# Altium PCB Fake.PcbDoc
Units mil, origin at the board's own origin, x right, y up, seen from the top; angles counter-clockwise.
Board outline 6000 x 4000 mil, 2 copper layers (Top Layer, Bottom Layer); 122 components, 82 nets, 618 pads, 0 vias.
Unrouted connection lines stored in the file: 222.
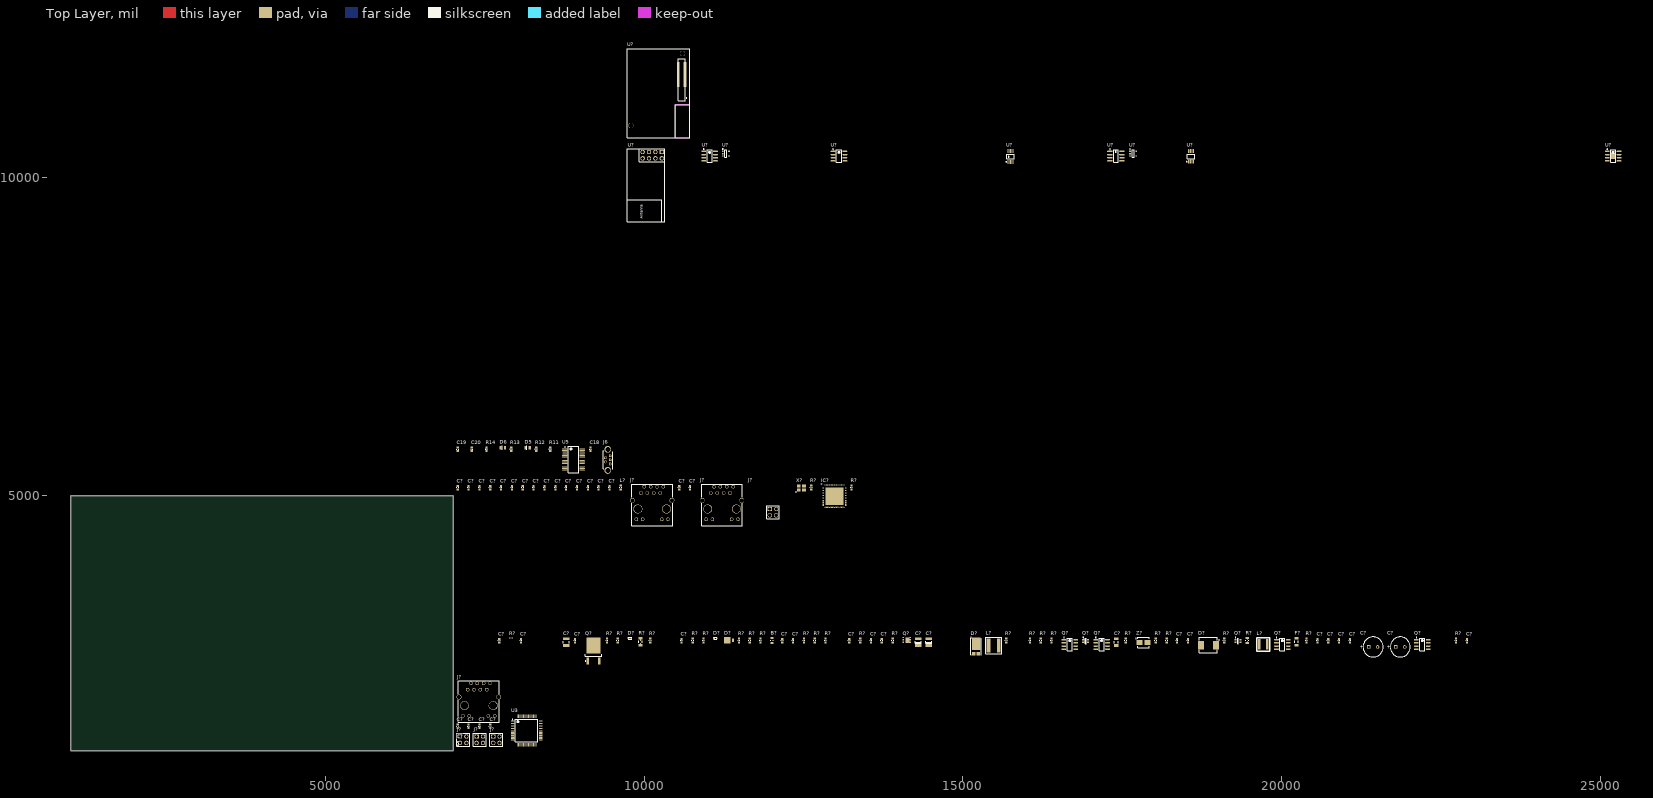
[diagram p0: Top Layer view]
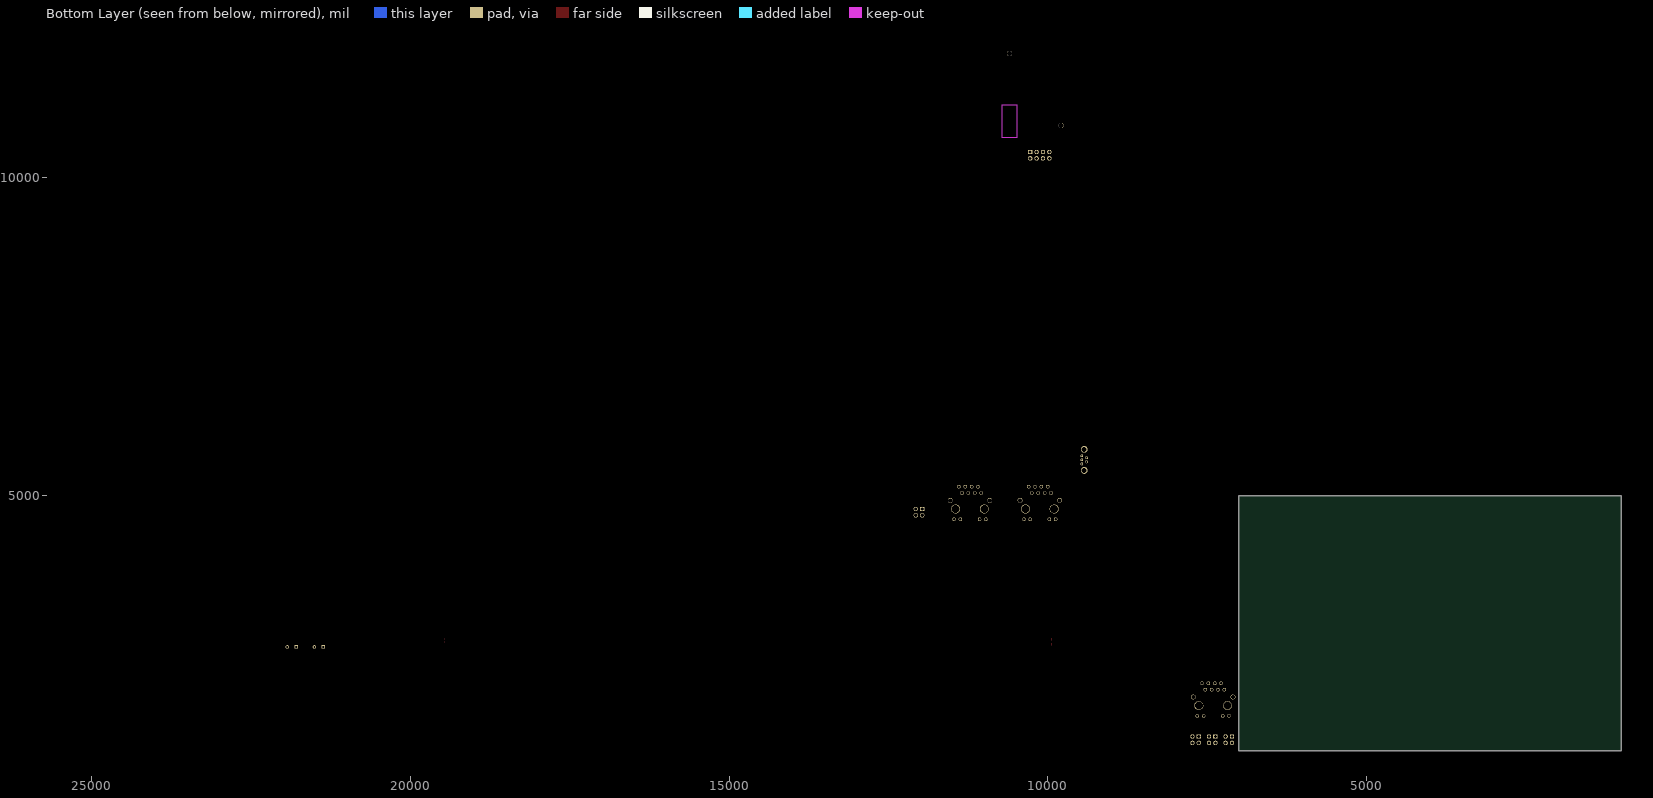
[diagram p1: Bottom Layer view, seen from below]

## Layer stack, top to bottom
Top Solder: solder mask 0.4, Solder Resist, Dk 3.5
Top Layer: signal copper 1.4
Dielectric 1: dielectric 12.6, FR-4, Dk 4.8
Bottom Layer: signal copper 1.4
Bottom Solder: solder mask 0.4, Solder Resist, Dk 3.5

## Board outline
1000,1000 7000,1000 7000,5000 1000,5000

## Design rules (kind name [scope] priority, off if disabled: settings)
Clearance [All] p1: gap=10
DiffPairsRouting [All] p1: maxlimit=10 minlimit=10 mostfreqgap=10 toplayer_minwidth=15 toplayer_maxwidth=15 toplayer_prefwidth=15 bottomlayer_minwidth=15 bottomlayer_maxwidth=15 bottomlayer_prefwidth=15 maxuncoupledlength=500
PolygonConnect [All] p1: connectstyle=Relief reliefconductorwidth=10 reliefentries=4 polygonreliefangle="90 Angle" airgapwidth=10
RoomDefinition Designator_1 [InComponentClass('Designator')] p1: confinementstyle=ConfineIn formatcopy=TRUE lockcomponents=FALSE outline 0,0 2000,0 2000,1000 0,1000
RoomDefinition ETHERNET_USB_HUB [InComponentClass('ETHERNET_USB_HUB')] p2: confinementstyle=ConfineIn formatcopy=TRUE lockcomponents=FALSE outline 7045,1060 7690,1060 7690,1550 7045,1550
RoomDefinition EDISON [InComponentClass('EDISON')] p3: confinementstyle=ConfineIn formatcopy=TRUE lockcomponents=FALSE outline 2675,7660 4675,7660 4675,8660 2675,8660
RoomDefinition USB_CONSOL [InComponentClass('USB_CONSOL')] p4: confinementstyle=ConfineIn formatcopy=TRUE lockcomponents=FALSE outline 7045,5335 9515,5335 9515,5895 7045,5895
RoomDefinition PIC [InComponentClass('PIC')] p5: confinementstyle=ConfineIn formatcopy=TRUE lockcomponents=FALSE outline 7045,5335 9515,5335 9515,5895 7045,5895
RoomDefinition Designator [InComponentClass('Designator')] p6: confinementstyle=ConfineIn formatcopy=TRUE lockcomponents=FALSE outline 7045,5335 9515,5335 9515,5895 7045,5895
RoutingVias [All] p1: holewidth=28 width=50 viastyle="Through Hole" minholewidth=28 minwidth=50 maxholewidth=28 maxwidth=50
SolderMaskExpansion [All] p1: expansion=4
Width [All] p1: maxlimit=10 minlimit=10 preferedwidth=10
29 further rules are at their usual default settings.

## Classes and differential pairs
component class PIC: C? U3
component class ETHERNET_USB_HUB: C? IC? J? L? R? X?
component class EDISON: U?
component class Designator: B? C? D? F? L? Q? R? U? Z?
component class USB_CONSOL: C18 C19 C20 D5 D6 J6 R11 R12 R13 R14 U5
differential pair USB_D: +USB_D_P -USB_D_N

## Components (designator, comment, footprint, x,y, rotation, side; value= is the part's Value field where it differs from the comment)
B? "FB_782853112" R0805 12005,2730 r90 top
C18 "__template_cap" C0603 9155,5730 r90 top
C19 "__template_cap" C0603 7075,5730 r90 top
C20 "__template_cap" C0603 7295,5730 r90 top
C? "__template_cap" C0603 7075,1115 r90 top
C? "__template_cap" C0603 7585,1385 r90 top
C? "__template_cap" C0603 7415,1385 r90 top
C? "__template_cap" C0603 7245,1385 r90 top
C? "__template_cap" C0603 7075,1385 r90 top
C? "__template_cap" C0603 8435,5130 r90 top
C? "__template_cap" C0603 8605,5130 r90 top
C? "__template_cap" C0603 8775,5130 r90 top
C? "__template_cap" C0603 8945,5130 r90 top
C? "__template_cap" C0603 9115,5130 r90 top
C? "__template_cap" C0603 9285,5130 r90 top
C? "__template_cap" C0603 9455,5130 r90 top
C? "__template_cap" C0603 7925,5130 r90 top
C? "__template_cap" C0603 8095,5130 r90 top
C? "__template_cap" C0603 8265,5130 r90 top
C? "__template_cap" C0603 7755,5130 r90 top
C? "__template_cap" C0603 7585,5130 r90 top
C? "__template_cap" C0603 7245,5130 r90 top
C? "__template_cap" C0603 7075,5130 r90 top
C? "__template_cap" C0603 7415,5130 r90 top
C? "__template_cap" c0603 10550,5130 r90 top
C? "__template_cap" c0603 10720,5130 r90 top
C? "__template_cap" C0603 22905,2730 r90 top
C? "__template_cap" C0603 18360,2730 r90 top
C? "__template_cap" C0603 18530,2730 r90 top
C? "680 μF" "WCAP-PTG5 8x8x3.5x0.6" 21860,2630 r0 top
C? "680 μF" "WCAP-PTG5 8x8x3.5x0.6" 21435,2630 r0 top
C? "__template_cap" C0603 21070,2730 r90 top
C? "__template_cap" C0603 20900,2730 r90 top
C? "__template_cap" C0603 20730,2730 r90 top
C? "__template_cap" C0603 20560,2730 r90 top
C? "__template_cap" C0603 13725,2730 r90 top
C? "__template_cap" C0603 13555,2730 r90 top
C? "__template_cap" C0603 12335,2730 r90 top
C? "__template_cap" C0603 12165,2730 r90 top
C? "CAP_TANT_330UF_6.3V" C1210P 14295,2705 r90 top
C? "CAP_TANT_330UF_6.3V" C1210P 14465,2705 r90 top
C? "__template_cap" C0603 13215,2730 r90 top
C? "__template_cap" C0603 10585,2730 r90 top
C? "__template_cap" C0603 8915,2730 r90 top
C? "__template_cap" C1210 8780,2705 r90 top
C? "__template_cap" C0603 8065,2730 r90 top
C? "__template_cap" C0603 7725,2730 r90 top
C? "__template_cap" C1206 17405,2705 r90 top
D5 "LED_LY974" 0805_Diode 8180,5755 r0 top
D6 "LED_LY974" 0805_Diode 7790,5755 r0 top
D? "__template_diode_std" SOD523 11115,2765 r0 top
D? "__template_diode_std" SOD523 9775,2765 r0 top
D? "__template_diode_schottky" DO-220AA 11300,2735 r0 top
D? "__template_diode_schottky" SMC 18850,2660 r0 top
D? "__template_diode_schottky" PowerDI5 15205,2585 r90 top
F? "__template_fuse" R1206 20235,2710 r90 top
IC? "LAN9512 www.hasseb.fi" QFN64-9X9 12985,4995 r0 top
J6 "732-2735-ND" CONN_USBMINIB_VERTICAL_WE 9465,5565 r90 top
J? "CONN_ETHERNET_MAG_PARJC07-111071A" ETHERNET_MAG_ARJC07-111071A 7405,1710 r0 top
J? "CONN HEADER 2x2POS T/H" CONN_2x2_100MIL_MALE 7110,1225 r0 top
J? "CONN HEADER 2x2POS T/H" CONN_2x2_100MIL_MALE 7370,1225 r0 top
J? "CONN HEADER 2x2POS T/H" CONN_2x2_100MIL_MALE 7630,1225 r0 top
J? "CONN HEADER 2x2POS T/H" CONN_2x2_100MIL_MALE 11970,4795 r0 top
J? "CONN_ETHERNET_MAG_PARJC07-111071A" ETHERNET_MAG_ARJC07-111071A 11220,4795 r0 top
J? "CONN_ETHERNET_MAG_PARJC07-111071A" ETHERNET_MAG_ARJC07-111071A 10125,4795 r0 top
L? "" R0603 9630,5130 r90 top
L? "IND_COILCRAFT_XAL5050-562" COILCRAFT_XAL5050-103 19710,2670 r0 top
L? "IND_COILCRAFT_XAL6030-182" IND_COILCRAFT_XAL60 15400,2655 r0 top
Q? "NFET_SI1970DH" SOT363-6N 19315,2725 r0 top
Q? "PFET_IRF7329PBFCT-ND" 8SOIC150 22205,2670 r0 top
Q? "PFET_IRF7329PBFCT-ND" 8SOIC150 17175,2670 r0 top
Q? "85V 50A TO-252" DPAK 9205,2570 r90 top
Q? "NFET_CSD16323Q3" 8-VSON 14060,2775 r0 top
Q? "NFET_SI1970DH" SOT363-6N 16925,2725 r0 top
Q? "PFET_IRF7329PBFCT-ND" 8SOIC150 20010,2670 r0 top
Q? "PFET_IRF7329PBFCT-ND" 8SOIC150 16675,2670 r0 top
R11 "__template_resistor" R0603 8525,5730 r90 top
R12 "__template_resistor" R0603 8305,5730 r90 top
R13 "__template_resistor" R0603 7915,5730 r90 top
R14 "__template_resistor" R0603 7525,5730 r90 top
R? "__template_resistor" R0603 13250,5130 r90 top
R? "__template_resistor" R0603 12620,5130 r90 top
R? "__template_resistor" R0603 18195,2730 r90 top
R? "__template_resistor" R0603 19100,2730 r90 top
R? "__template_resistor" R0603 20390,2730 r90 top
R? "__template_resistor" R0603 16390,2730 r90 top
R? "__template_resistor" R0603 16220,2730 r90 top
R? "__template_resistor" R0603 17555,2730 r90 top
R? "__template_resistor" R0603 16050,2730 r90 top
R? "__template_resistor" R0603 22735,2730 r90 top
R? "__template_resistor" R0603 18025,2730 r90 top
R? "RESISTOR .020 OHM 1/4W 1% 0805" R0805_SHUNT 19460,2730 r90 top net-tie
R? "__template_resistor" R0603 11485,2730 r90 top
R? "__template_resistor" R0603 10930,2730 r90 top
R? "__template_resistor" R0603 12505,2730 r90 top
R? "__template_resistor" R0603 12675,2730 r90 top
R? "__template_resistor" R0603 12845,2730 r90 top
R? "__template_resistor" R0603 11825,2730 r90 top
R? "__template_resistor" R0603 13390,2730 r90 top
R? "__template_resistor" R0603 13900,2730 r90 top
R? "__template_resistor" R0603 15680,2730 r90 top
R? "__template_resistor" R0603 11655,2730 r90 top
R? "__template_resistor" R0603 9585,2730 r90 top
R? "__template_resistor" R0603 10095,2730 r90 top
R? "__template_resistor" R0603 10760,2730 r90 top
R? "__template_resistor" R0603 9415,2730 r90 top
R? "RES_CURRENT_SENSE_0.002_OHM_1W_1%_1206_SMD" R1206_SHUNT 9940,2710 r90 top net-tie
R? "__template_resistor" R0402 7910,2770 r0 top
U3 "MCHP_dsPIC33EP128MC506" 64TQFP10 8155,1320 r0 top
U5 "FT232RL-Tube" SSOP-28_N 8890,5570 r0 top
U? "INTEL_EDISON" INTEL_EDISON 9790,10810 r0 top
U? "BUCK_TPS54540" 8SOIC150E 25200,10330 r0 top
U? "UCC381DP-3" TI-D8_N 17400,10330 r0 top
U? "LTC1871EMS#PBF" LT-MS-10_N 15745,10325 r90 top
U? "BUFFER_SN74AHCT1G125DBVR" 5SOT23 17670,10370 r0 top
U? "PIC12F1571-I/MS" MCHP-MSOP-MS8_N 18580,10325 r90 top
U? "FETDRIVER_LT1910" 8SOIC150 13055,10330 r0 top
U? "ISENSE_ACS711" 8SOIC150 11025,10330 r0 top
U? "TSENSE_TC74" 5SOT23 11280,10370 r0 top
U? "SEEEDSTUDIO_nRF24L01+" SEEEDSTUDIO_nRF24L01 10325,10445 r90 top
X? "XTAL_ XC1817CT-ND" 4_SMD_3.2X2.5MM 12465,5120 r0 top
Z? "__template_diode_zener" DO-214AA 17830,2700 r0 top

## Footprints (in the part's own frame and the unit in brackets; to place one, negate y for a bottom-side part, rotate by r counter-clockwise, add the part's x,y. Pads: shape width x height; smd on the part's side, far side on the other; paste and mask are expansions set on the pad)
4_SMD_3.2X2.5MM [mm]
  rect 1.5x1.2 smd: 1(-1.06,-0.8) 2(1.06,-0.8) 3(1.06,0.8) 4(-1.06,0.8)
  silkscreen extent -2.2,-1.6 -2,-1.4, body extent -1.6,-1.25 1.6,1.25, height 1
5SOT23 [mm] "SOT23, 5-Leads, Body 2.9x2.8mm (max), Pitch 0.95mm, IPC High Density"
  rect 0.75x0.55 smd: 1(-1.225,0.95) 2(-1.225,0) 3(-1.225,-0.95) 4(1.225,-0.95) 5(1.225,0.95)
  silkscreen extent -1.35,-1.45 0.45,1.9, body extent -1.5,-1.5 1.5,1.5, height 1.46
8-VSON [mm] "PowerPAK 1212-8 Single (Vishay footprint)"
  rect 0.63x0.4 smd mask+0.07: 1(0,0) 2(0,-0.65) 3(0,-1.3) 4(0,-1.95) 5(2.875,-1.95) 5(2.875,-1.3) 5(2.875,-0.65) 5(2.875,0)
  rect 1.725x2.204 smd: 5(1.75,-0.975)
  body extent -0.33,-2.23 3.17,0.27, height 1.05
8SOIC150 [mm] "SOIC, 8-Leads, Body 5.0x4.0mm (max), Pitch 1.27mm, IPC High Density"
  oval 1.9x0.6 smd: 1(-2.35,1.905) 2(-2.35,0.635) 3(-2.35,-0.635) 4(-2.35,-1.905) 5(2.35,-1.905) 6(2.35,-0.635) 7(2.35,0.635) 8(2.35,1.905)
  silkscreen extent -2.47,-2.5 1,2.88, body extent -3.01,-2.5 3.01,2.5, height 1.75
8SOIC150E [mm] "SOIC, 8-Leads, Body 5.0x4.0mm (max), Pitch 1.27mm, IPC High Density"
  oval 1.9x0.6 smd: 1(-2.35,1.905) 2(-2.35,0.635) 3(-2.35,-0.635) 4(-2.35,-1.905) 5(2.35,-1.905) 6(2.35,-0.635) 7(2.35,0.635) 8(2.35,1.905)
  rect 2.29x2.29 smd: 9(0,0)
  silkscreen extent -2.47,-2.5 1,2.88, body extent -3.01,-2.5 3.01,2.5, height 1.75
64TQFP10 [mm] "TSQFP, 64-Leads, Body 12.0x12.0mm (max), Pitch 0.50mm, IPC High Density"
  oval 1.4x0.25 smd: 1(-5.6,3.75) 2(-5.6,3.25) 3(-5.6,2.75) 4(-5.6,2.25) 5(-5.6,1.75) 6(-5.6,1.25) 7(-5.6,0.75) 8(-5.6,0.25) 9(-5.6,-0.25) 10(-5.6,-0.75) 11(-5.6,-1.25) 12(-5.6,-1.75) 13(-5.6,-2.25) 14(-5.6,-2.75) 15(-5.6,-3.25) 16(-5.6,-3.75) 33(5.6,-3.75) 34(5.6,-3.25) 35(5.6,-2.75) 36(5.6,-2.25) 37(5.6,-1.75) 38(5.6,-1.25) 39(5.6,-0.75) 40(5.6,-0.25) 41(5.6,0.25) 42(5.6,0.75) 43(5.6,1.25) 44(5.6,1.75) 45(5.6,2.25) 46(5.6,2.75) 47(5.6,3.25) 48(5.6,3.75)
  oval 0.25x1.4 smd: 17(-3.75,-5.6) 18(-3.25,-5.6) 19(-2.75,-5.6) 20(-2.25,-5.6) 21(-1.75,-5.6) 22(-1.25,-5.6) 23(-0.75,-5.6) 24(-0.25,-5.6) 25(0.25,-5.6) 26(0.75,-5.6) 27(1.25,-5.6) 28(1.75,-5.6) 29(2.25,-5.6) 30(2.75,-5.6) 31(3.25,-5.6) 32(3.75,-5.6) 49(3.75,5.6) 50(3.25,5.6) 51(2.75,5.6) 52(2.25,5.6) 53(1.75,5.6) 54(1.25,5.6) 55(0.75,5.6) 56(0.25,5.6) 57(-0.25,5.6) 58(-0.75,5.6) 59(-1.25,5.6) 60(-1.75,5.6) 61(-2.25,5.6) 62(-2.75,5.6) 63(-3.25,5.6) 64(-3.75,5.6)
  silkscreen extent -5.72,-4.5 4.5,4.55, body extent -6.01,-6.01 6.01,6.01, height 1.35
0805_Diode [mm]
  rect 0.85x1.4 smd: 1(-1.129,0) 2(0.621,0)
  silkscreen extent -0.5,-0.8 -0.5,0.8, body extent -1.25,-0.62 0.75,0.63, height 0.59
C0603 [mm] "Chip Capacitor, 2-Leads, Body 1.6x0.8mm, IPC High Density"
  rect 0.8x0.85 smd: 1(-0.7,0) 2(0.7,0)
  silkscreen extent -0.1,-0.33 0.1,0.33, body extent -0.8,-0.4 0.8,0.4, height 0.8
c0603 [mm] "Chip Capacitor, 2-Leads, Body 1.6x0.8mm, IPC High Density"
  rect 0.8x0.85 smd: 1(-0.7,0) 2(0.7,0)
  silkscreen extent -0.1,-0.33 0.1,0.33, body extent -0.8,-0.4 0.8,0.4, height 0.8
C1206 [mm] "Chip Capacitor, 2-Leads, Body 3.2x1.6mm, IPC High Density"
  rect 1.1x1.75 smd: 1(-1.35,0) 2(1.35,0)
  silkscreen extent -0.4,-0.77 0.4,0.77, body extent -1.6,-0.8 1.6,0.8, height 0.78
C1210 [mm] "Chip Capacitor, 2-Leads, Body 3.2x2.5mm, IPC High Density"
  rect 1.1x2.6 smd: 1(-1.35,0) 2(1.35,0)
  silkscreen extent -0.4,-1.2 0.4,1.2, body extent -1.6,-1.25 1.6,1.25, height 0.78
C1210P [mm] "Chip Capacitor, 2-Leads, Body 3.2x2.5mm, IPC High Density"
  rect 1.1x2.6 smd: 1(-1.35,0) 2(1.35,0)
  silkscreen extent -0.4,-1.2 0.4,1.2, body extent -1.6,-1.25 1.6,1.25, height 0.78
COILCRAFT_XAL5050-103 [mm]
  rect 1x4.24 smd: 1(-1.655,0) 2(1.655,0)
  silkscreen extent -2.64,-2.74 2.64,2.74, body extent -2.74,-2.84 2.74,2.84, height 5.1
CONN_2x2_100MIL_MALE [mm]
  rect 1.75x1.75 hole 1.27: 1(0,0)
  round 1.75 hole 1.27: 2(2.54,0) 3(0,-2.54) 4(2.54,-2.54)
  silkscreen extent -1.27,-3.81 3.81,1.27, body extent -1.27,-3.81 3.81,1.27, height 9.5
CONN_USBMINIB_VERTICAL_WE [mm]
  rrect100% 1.1x1.1 hole 0.7: 1(-1.6,0) 2(-0.8,1.9) 3(0,0) 4(0.8,1.9) 5(1.6,0)
  round 2.7 hole 2: 6(-4.2,0.95) 7(4.2,0.95)
  silkscreen extent -3.56,-1.02 3.56,2.79, body extent -5.1,-1.05 5.1,2.85, height 9.1
DO-214AA [mm] "Molded Diode, 2-Leads, Body 4.31x3.62mm, IPC Medium Density"
  rect 2.45x2.15 smd: 1(-1.575,0) 2(1.575,0)
  silkscreen extent -3.07,-2 2.3,2, body extent -2.29,-1.97 2.28,1.97, height 2.5
DO-220AA [mil]
  rect 105.12x100 smd: 1(0,0)
  rect 30x50 smd: 2(92.56,0)
DPAK [mm] "D-PAK, 3-Pads, Body 6.2x6.7mm (max), IPC High Density"
  rect 2.75x0.9 smd: 1(-4,2.29) 3(-4,-2.29)
  rect 6.3x5.5 smd: 2(2.15,0)
  silkscreen extent -4.12,-3.35 -1.4,3.41, body extent -4.57,-3.28 5.13,3.3, height 2.3
ETHERNET_MAG_ARJC07-111071A [mil] "CONN MOD JACK 8P8C VERT SHIELDED"
  rrect100% 75x75 hole 65: 0(-310,135) 0(310,135)
  rrect100% 140x140 hole 126: 0(-225,0) 0(225,0)
  rrect100% 55x55 hole 40: 1(-175,250) 2(-125,350) 3(-75,250) 4(-25,350) 5(25,250) 6(75,350) 7(125,250) 8(175,350) 9(-248,-162) 10(-150,-162) 11(150,-162) 12(248,-162)
  silkscreen extent -320,-260 320,390, body extent -315,-265 315,389, height 663
IND_COILCRAFT_XAL60 [mil]
  rect 56x216 smd: 1(0,0) 2(159,0)
  silkscreen extent -45,-130 205,130, body extent -45,-129 205,129, height 122
INTEL_EDISON [mm]
  round 2 hole 2: 1(0,0) 1(20.6,28.69)
  rect 1.14x0.2 smd: 1(21.55,11.5) 2(18.91,11.5) 3(21.55,11.9) 4(18.91,11.9) 5(21.55,12.3) 6(18.91,12.3) 7(21.55,12.7) 8(18.91,12.7) 9(21.55,13.1) 10(18.91,13.1) 11(21.55,13.5) 12(18.91,13.5) 13(21.55,13.9) 14(18.91,13.9) 15(21.55,14.3) 16(18.91,14.3) 17(21.55,14.7) 18(18.91,14.7) 19(21.55,15.1) 20(18.91,15.1) 21(21.55,15.5) 22(18.91,15.5) 23(21.55,15.9) 24(18.91,15.9) 25(21.55,16.3) 26(18.91,16.3) 27(21.55,16.7) 28(18.91,16.7) 29(21.55,17.1) 30(18.91,17.1) 31(21.55,17.5) 32(18.91,17.5) 33(21.55,17.9) 34(18.91,17.9) 35(21.55,18.3) 36(18.91,18.3) 37(21.55,18.7) 38(18.91,18.7) 39(21.55,19.1) 40(18.91,19.1) 41(21.55,19.5) 42(18.91,19.5) 43(21.55,19.9) 44(18.91,19.9) 45(21.55,20.3) 46(18.91,20.3) 47(21.55,20.7) 48(18.91,20.7) 49(21.55,21.1) 50(18.91,21.1) 51(21.55,21.5) 52(18.91,21.5) 53(21.55,21.9) 54(18.91,21.9) 55(21.55,22.3) 56(18.91,22.3) 57(21.55,22.7) 58(18.91,22.7) 59(21.55,23.1) 60(18.91,23.1) 61(21.55,23.5) 62(18.91,23.5) 63(21.55,23.9) 64(18.91,23.9) 65(21.55,24.3) 66(18.91,24.3) 67(21.55,24.7) 68(18.91,24.7) 69(21.55,25.1) 70(18.91,25.1)
  Top Layer region: 19.6,15.1 19.6,15.1 20,15.1 20,15.1
  Keep-Out Layer region: 17.775,8.25 17.775,-4.8 23.525,-4.8 23.525,8.25
  Mechanical 8 keep-out lines w0.025: 21.233,11.351 21.867,11.351
  Mechanical 8 keep-out lines w0.051: 18.649,11.7 19.161,11.7 ; 18.649,12.1 19.161,12.1 ; 18.649,12.5 19.161,12.5 ; 18.649,12.9 19.161,12.9 ; 18.649,13.3 19.161,13.3 ; 18.649,13.7 19.161,13.7 ; 18.649,14.1 19.161,14.1 ; 18.649,14.5 19.161,14.5 ; 18.649,14.9 19.161,14.9 ; 18.649,15.3 19.161,15.3 ; 18.649,15.7 19.161,15.7 ; 18.649,16.1 19.161,16.1 ; 18.649,16.5 19.161,16.5 ; 18.649,16.9 19.161,16.9 ; 18.649,17.3 19.161,17.3 ; 18.649,17.7 19.161,17.7 ; 18.649,18.1 19.161,18.1 ; 18.649,18.5 19.161,18.5 ; 18.649,18.9 19.161,18.9 ; 18.649,19.3 19.161,19.3 ; 18.649,19.7 19.161,19.7 ; 18.649,20.1 19.161,20.1 ; 18.649,20.5 19.161,20.5 ; 18.649,20.9 19.161,20.9 ; 18.649,21.3 19.161,21.3 ; 18.649,21.7 19.161,21.7 ; 18.649,22.1 19.161,22.1 ; 18.649,22.5 19.161,22.5 ; 18.649,22.9 19.161,22.9 ; 18.649,23.3 19.161,23.3 ; 18.649,23.7 19.161,23.7 ; 18.649,24.1 19.161,24.1 ; 18.649,24.5 19.161,24.5 ; 18.649,24.9 19.161,24.9 ; 21.294,11.7 21.806,11.7 ; 21.294,12.1 21.806,12.1 ; 21.294,12.5 21.806,12.5 ; 21.294,12.9 21.806,12.9 ; 21.294,13.3 21.806,13.3 ; 21.294,13.7 21.806,13.7 ; 21.294,14.1 21.806,14.1 ; 21.294,14.5 21.806,14.5 ; 21.294,14.9 21.806,14.9 ; 21.294,15.3 21.806,15.3 ; 21.294,15.7 21.806,15.7 ; 21.294,16.1 21.806,16.1 ; 21.294,16.5 21.806,16.5 ; 21.294,16.9 21.806,16.9 ; 21.294,17.3 21.806,17.3 ; 21.294,17.7 21.806,17.7 ; 21.294,18.1 21.806,18.1 ; 21.294,18.5 21.806,18.5 ; 21.294,18.9 21.806,18.9 ; 21.294,19.3 21.806,19.3 ; 21.294,19.7 21.806,19.7 ; 21.294,20.1 21.806,20.1 ; 21.294,20.5 21.806,20.5 ; 21.294,20.9 21.806,20.9 ; 21.294,21.3 21.806,21.3 ; 21.294,21.7 21.806,21.7 ; 21.294,22.1 21.806,22.1 ; 21.294,22.5 21.806,22.5 ; 21.294,22.9 21.806,22.9 ; 21.294,23.3 21.806,23.3 ; 21.294,23.7 21.806,23.7 ; 21.294,24.1 21.806,24.1 ; 21.294,24.5 21.806,24.5 ; 21.294,24.9 21.806,24.9
  silkscreen extent -1.48,-4.83 23.53,30.68, body extent -1.32,-4.93 23.76,30.63, height 5.51
LT-MS-10_N [mm] "SOP, 10-Leads, Body 3.1x3.1mm, Pitch 0.5mm, IPC Medium Density"
  oval 1.6x0.3 smd: 1(-2.125,1) 2(-2.125,0.5) 3(-2.125,0) 4(-2.125,-0.5) 5(-2.125,-1) 6(2.125,-1) 7(2.125,-0.5) 8(2.125,0) 9(2.125,0.5) 10(2.125,1)
  silkscreen extent -2.25,-1.55 0.92,1.82, body extent -1.55,-1.55 1.55,1.55, height 1.1
MCHP-MSOP-MS8_N [mm] "SOP, 8-Leads, Body 3x3mm, Pitch 0.65mm, IPC Medium Density"
  oval 1.6x0.45 smd: 1(-2.1,0.975) 2(-2.1,0.325) 3(-2.1,-0.325) 4(-2.1,-0.975) 5(2.1,-0.975) 6(2.1,-0.325) 7(2.1,0.325) 8(2.1,0.975)
  silkscreen extent -2.22,-1.5 0.9,1.87, body extent -1.5,-1.5 1.5,1.5, height 1.1
PowerDI5 [mm]
  rect 1.4x1.39 smd: 1(-1.552,0.92) 3(-1.552,-0.92)
  rect 4.86x3.36 smd: 2(2.43,0)
  silkscreen extent -2,-2.1 5,2.1, body extent -1.9,-2 4.7,2.05, height 1.15
QFN64-9X9 [mil]
  rrect100% 21.65x9.84 smd: 1(-176.26,147.64) 2(-176.26,127.95) 3(-176.26,108.27) 4(-176.26,88.58) 5(-176.26,68.9) 6(-176.26,49.21) 7(-176.26,29.53) 8(-176.26,9.84) 9(-176.26,-9.84) 10(-176.26,-29.53) 11(-176.26,-49.21) 12(-176.26,-68.9) 13(-176.26,-88.58) 14(-176.26,-108.27) 15(-176.26,-127.95) 16(-176.26,-147.64) 33(176.26,-147.64) 34(176.26,-127.95) 35(176.26,-108.27) 36(176.26,-88.58) 37(176.26,-68.9) 38(176.26,-49.21) 39(176.26,-29.53) 40(176.26,-9.84) 41(176.26,9.84) 42(176.26,29.53) 43(176.26,49.21) 44(176.26,68.9) 45(176.26,88.58) 46(176.26,108.27) 47(176.26,127.95) 48(176.26,147.64)
  rrect100% 9.84x21.65 smd: 17(-147.64,-176.26) 18(-127.95,-176.26) 19(-108.27,-176.26) 20(-88.58,-176.26) 21(-68.9,-176.26) 22(-49.21,-176.26) 23(-29.53,-176.26) 24(-9.84,-176.26) 25(9.84,-176.26) 26(29.53,-176.26) 27(49.21,-176.26) 28(68.9,-176.26) 29(88.58,-176.26) 30(108.27,-176.26) 31(127.95,-176.26) 32(147.64,-176.26) 49(147.64,176.26) 50(127.95,176.26) 51(108.27,176.26) 52(88.58,176.26) 53(68.9,176.26) 54(49.21,176.26) 55(29.53,176.26) 56(9.84,176.26) 57(-9.84,176.26) 58(-29.53,176.26) 59(-49.21,176.26) 60(-68.9,176.26) 61(-88.58,176.26) 62(-108.27,176.26) 63(-127.95,176.26) 64(-147.64,176.26)
  rect 279.53x279.53 smd: EXP(0,0)
R0402 [mm] "Chip Resistor, 2-Leads, Body 1.0x0.5mm, IPC High Density"
  rect 0.65x0.55 smd: 1(-0.475,0) 2(0.475,0)
  body extent -0.5,-0.25 0.5,0.25, height 0.35
R0603 [mm] "Chip Resistor, 2-Leads, Body 1.6x0.8mm, IPC High Density"
  rect 0.8x0.9 smd: 1(-0.75,0) 2(0.75,0)
  silkscreen extent -0.15,-0.35 0.15,0.35, body extent -0.8,-0.4 0.8,0.4, height 0.45
R0805 [mm] "Chip Resistor, 2-Leads, Body 2.0x1.3mm, IPC High Density"
  rect 0.8x1.25 smd: 1(-0.95,0) 2(0.95,0)
  silkscreen extent -0.15,-0.53 0.15,0.53, body extent -1,-0.62 1,0.63, height 0.6
R0805_SHUNT [mil] "Chip Resistor, 2-Leads, Body 2.0x1.3mm, IPC High Density"
  rect 31.5x49.21 smd: 1(-37.4,0) 2(37.4,0)
  rrect100% 15x6 smd: 3(-15,0) 4(15,0)
  Top Layer region: -40,-3 -10,-3 -10,3 -40,3
  Top Layer region: 10,-3 40,-3 40,3 10,3
  silkscreen extent -6,-21 6,21, body extent -39,-25 39,25, height 24
R1206 [mm] "Chip Resistor, 2-Leads, Body 3.1x1.6mm, IPC High Density"
  rect 1.05x1.6 smd: 1(-1.375,0) 2(1.375,0)
  silkscreen extent -0.45,-0.7 0.45,0.7, body extent -1.6,-0.8 1.6,0.8, height 0.6
R1206_SHUNT [mm] "Chip Resistor, 2-Leads, Body 3.1x1.6mm, IPC High Density"
  rect 1.05x1.6 smd: 1(-1.375,0) 2(1.375,0)
  rrect100% 0.457x0.152 smd: 3(-0.635,0) 4(0.635,0)
  Top Layer region: -1.524,-0.076 -0.508,-0.076 -0.508,0.076 -1.524,0.076
  Top Layer region: 0.508,-0.076 1.524,-0.076 1.524,0.076 0.508,0.076
  silkscreen extent -0.45,-0.7 0.45,0.7, body extent -1.6,-0.8 1.6,0.8, height 0.6
SEEEDSTUDIO_nRF24L01 [mm] "2Mbps RF transceiver"
  rect 1.75x1.75 hole 1.2: 1(-1.27,1.27)
  round 1.75 hole 1.2: 2(-3.81,1.27) 3(-1.27,3.81) 4(-3.81,3.81) 5(-1.27,6.35) 6(-3.81,6.35) 7(-1.27,8.89) 8(-3.81,8.89)
  silkscreen extent -29,0 0,15, body extent -29,0 0,15, height 5.08
SMC [mm] "Molded Diode, 2-Leads, Body 6.9x5.9mm, IPC High Density"
  rect 2.35x3.4 smd: 1(-3.025,0) 2(3.025,0)
  silkscreen extent -3.6,-3.15 4.38,3.15, body extent -3.97,-2.95 3.98,2.95, height 2.3
SOD523 [mm] "Molded Diode, 2-Leads, Body 1.2x0.8mm, IPC High Density"
  rect 0.7x0.5 smd: 1(0.55,0) 2(-0.55,0)
  silkscreen extent -0.9,-0.45 0.65,0.5, body extent -0.8,-0.4 0.8,0.4, height 0.7
SOT363-6N [mm] "SOT363, 6-Leads, Body 2x1.3mm, Pitch 0.65mm, Lead Span 2.1mm, IPC Medium Density"
  rect 0.85x0.4 smd: 1(-0.95,0.65) 2(-0.95,0) 3(-0.95,-0.65) 4(0.95,-0.65) 5(0.95,0) 6(0.95,0.65)
  silkscreen extent -1.07,-1.1 0.15,1.52, body extent -0.7,-1.1 0.7,1.1, height 1
SSOP-28_N [mm] "SOP, 28-Leads, Body 10.2x5.3mm, Pitch 0.65mm, IPC Medium Density"
  oval 2.1x0.35 smd: 1(-3.45,4.225) 2(-3.45,3.575) 3(-3.45,2.925) 4(-3.45,2.275) 5(-3.45,1.625) 6(-3.45,0.975) 7(-3.45,0.325) 8(-3.45,-0.325) 9(-3.45,-0.975) 10(-3.45,-1.625) 11(-3.45,-2.275) 12(-3.45,-2.925) 13(-3.45,-3.575) 14(-3.45,-4.225) 15(3.45,-4.225) 16(3.45,-3.575) 17(3.45,-2.925) 18(3.45,-2.275) 19(3.45,-1.625) 20(3.45,-0.975) 21(3.45,-0.325) 22(3.45,0.325) 23(3.45,0.975) 24(3.45,1.625) 25(3.45,2.275) 26(3.45,2.925) 27(3.45,3.575) 28(3.45,4.225)
  silkscreen extent -3.57,-5.25 2,5.25, body extent -2.8,-5.25 2.8,5.25, height 2
TI-D8_N [mm] "SOIC, 8-Leads, Body 4.9x3.9mm, Pitch 1.27mm, IPC Medium Density"
  oval 2.2x0.6 smd: 1(-2.4,1.905) 2(-2.4,0.635) 3(-2.4,-0.635) 4(-2.4,-1.905) 5(2.4,-1.905) 6(2.4,-0.635) 7(2.4,0.635) 8(2.4,1.905)
  silkscreen extent -2.52,-2.5 0.9,2.88, body extent -2,-2.5 2,2.5, height 1.75
"WCAP-PTG5 8x8x3.5x0.6" [mm] "Polarized capacitors, Aluminum Polymer Capacitors, 2-Leads, Body 8x8x3.5x0.6"
  rect 1.4x1.4 hole 0.9: 1(-1.75,0)
  round 1.4 hole 0.9: 2(1.75,0)
  silkscreen extent -4,-4 4,4, body extent -3.97,-3.98 3.99,3.99, height 8.21

## Part data
B?: "FERRITE BEAD 1100 OHM 800MA"
C18 C? C? C? C? C? C? C? C? C? C? C? C? C? C?: library part 399-1097-1-ND
C19: library part 478-1239-1-ND
C20 C?: library part 399-3482-1-ND
C? C? C? C? C?: library part 478-3726-1-ND
C? C?: library part 587-1255-1-ND
C?: library part 399-1281-1-ND
C?: library part 478-1165-1-ND
C?: library part 399-1090-1-ND
C? C?: library part "WCAP-PTG5 8x8x3.5x0.6 870025174008", "WCAP-PTG5 Aluminum Polymer Capacitors , 680 µF; + / - 20%; 6,3 V , 8 x 8"
C? C? C? C? C?: library part 399-1095-1-ND
C?: library part 478-1251-1-ND
C?: library part 478-1175-1-ND
C? C?: "330UF 1210 SMD TANTALUM CAPACITOR"
C? C?: library part 478-1235-1-ND
C?: library part 399-3084-1-ND
C? C?: library part 399-1282-1-ND
D5 D6: "LED 0805 RED 20MA"
IC?: library part MICROCHIP_LAN9512
J6: library part CONN_USB_MINI_B_WE651005136421, "USB - mini B Receptacle Connector 5 Position Through Hole, Vertical"
J? J? J?: "1 Port RJ45 Magjack Connector Through Hole 10/100 Base-TX, AutoMDIX"
J? J? J? J?: library part CONN_2x2
L?: library part __template_inductor
L?: "INDUCTOR 5.6UH 20% SMD"
L?: "Fixed Inductors XAL6030 High Current 1.8 uH 20 % 14 A"
Q? Q?: "MOSFET 2N-CH 30V 1.3A SC70-6"
Q? Q? Q? Q?: "MOSFET 2P-CH 12V 9.2A 8-SOIC"
Q?: library part NFET_IXTY50N085T, "MOSFET N-CH 85V 50A TO-252"
Q?: "MOSFET N-CH 25V 3.3X3.3 8-SON"
R11 R? R? R? R? R? R? R? R?: library part CRCW060310K0FKEA, "RES SMD 10K OHM 1% 1/10W 0603"
R12: library part CRCW06034K70FKEA, "RES SMD 4.7K OHM 1% 1/10W 0603"
R13 R14: library part CRCW0603200RFKEA, "RES SMD 200 OHM 1% 1/10W 0603"
R?: library part CRCW060312K4FKEA, "RES SMD 12.4K OHM 1% 1/10W 0603"
R?: library part CRCW06031M00FKEA, "RES SMD 1M OHM 1% 1/10W 0603"
R?: library part CRCW060380K6FKEA, "RES SMD 80.6K OHM 1% 1/10W 0603"
R?: library part CRCW060322K0FKEA, "RES SMD 22K OHM 1% 1/10W 0603"
R?: library part CRCW06032K20FKEA, "RES SMD 2.2K OHM 1% 1/10W 0603"
R?: library part CRCW060313K0FKEA, "RES SMD 13K OHM 1% 1/10W 0603"
R? R?: library part CRCW060349K9FKEA, "RES SMD 49.9K OHM 1% 1/10W 0603"
R?: library part RES_CURRENT_SENSE_0.020_OHM_0.25W_1%
R? R?: library part CRCW060330K0FKEA, "RES SMD 30K OHM 1% 1/10W 0603"
R?: library part CRCW0603107KFKEA, "RES SMD 107K OHM 1% 1/10W 0603"
R? R?: library part CRCW06031K00FKEA, "RES SMD 1K OHM 1% 1/10W 0603"
R?: library part CRCW06034K99FKEA, "RES SMD 4.99K OHM 1% 1/10W 0603"
R?: "RES .002OHM 1W 1% 1206 SMD"
R?: library part CRCW040210K0FKED, "RES SMD 10K OHM 1% 1/16W 0402"
U5: "USB UART Asynchronous Serial Data Transfer Chip, SSOP-28, Tube"
U?: "Edison Intel® Edison Platform Atom™ Series MPU Atom™ Core Embedded Evaluation Board"
U?: "Split Rail Switching Regulator IC Positive Adjustable 0.8V 1 Output 5A 8-SOIC (0.154\", 3.90mm Width) Exposed Pad"
U?: "Single Output LDO, 1 A, Fixed 3.3 V Output, 3.9 to 9 V Input, with Low IQ, 8-pin SOIC (D), 0 to 70 degC, Green (RoHS & no Sb/Br)"
U?: "Wide Input Range, No Rsense Current Mode Boost, Flyback and SEPIC Controller, 10-pin SOP (MS-10), -40 to 85 degC, Pb-Free"
U?: "IC BUS BUFF TRI-ST N-INV SOT23-5"
U?: "Microcontroller with High Precision 16-Bit PWMs, 1K (x14-Bit words) Program Memory, 128 Bytes SRAM, 6 I/O, Industrial Temperature, 8-Pin MSOP (MS8), Tube"
U?: "IC MOSFET DRIVER HI-SIDE 8-SOIC"
U?: "SENSOR CURRENT HALL 12.5A AC/DC"
U?: "Board Mount Temperature Sensors Digital Thermal"
U?: "RF24L01 ULP 2Mbps RF transceiver 2.4GHz ISM"
X?: "25MHz ±10ppm Crystal 20pF 40 Ohm -20°C ~ 70°C Surface Mount 4-SMD, No Lead (DFN, LCC)"

## Nets (pads, with @x,y where several pads share a name; then routed paths per layer and width w, separated by ;. In a path a pad name is that pad's centre, name@x,y a point inside that pad or via, vN(x,y) a via of type N, cw(c..) or ccw(c..) an arc to the next point about the centre after c; other vN are vias at no path point)
1V8: C?.1@7075,5102.44 C?.1@7245,5102.44 C?.1@7415,5102.44 IC?.15 IC?.38 U5.4 U5.20 U?.12
3V3: C?.1@7585,5102.44 C?.1@7725,2702.44 C?.1@7755,5102.44 C?.1@7925,5102.44 C?.1@8095,5102.44 C?.1@8265,5102.44 C?.1@13215,2702.44 C?.1@13555,2702.44 C?.2@7075,1142.56 C?.2@7075,1412.56 C?.2@7245,1412.56 C?.2@7415,1412.56 C?.2@7585,1412.56 IC?.19 IC?.27 IC?.33 IC?.39 IC?.46 L?.1@9630,5100.47 R?.2@7928.7,2770 U3.10 U3.19 U3.26 U3.38 U3.57 U?.1@17305.51,10405 U?.1@18541.61,10242.32 U?.2@10275,10295 U?.3@11231.77,10332.6 U?.4@17305.51,10255
3V3_LAN: C?.1@8435,5102.44 C?.1@8605,5102.44 C?.1@8775,5102.44 C?.1@8945,5102.44 C?.1@9115,5102.44 C?.1@9285,5102.44 C?.1@9455,5102.44 IC?.5 IC?.10 IC?.49 IC?.51 IC?.54 IC?.57 IC?.64 L?.2@9630,5159.53
5V5: C?.1@13725,2702.44 C?.1@20560,2702.44 C?.1@20730,2702.44 C?.1@20900,2702.44 C?.1@21070,2702.44 C?.1@21366.1,2630 C?.1@21791.1,2630 R?.1@19460,2692.6 R?.3@19460,2715 U?.5@17718.23,10407.4 U?.8@17494.49,10405
5V5_FUSE: R?.2@19460,2767.4 R?.4@19460,2745
5V5_MERGE: Q?.1@17082.48,2745 Q?.1@22112.48,2745
5V5_VBACKUP: C?.1@14295,2651.85 D?.2@15205,2680.67 Q?.3@19917.48,2645 R?.2@12845,2759.53 R?.2@18025,2759.53 R?.2@22735,2759.53
5V5_VBAT: C?.1@17405,2651.85 L?.2@19775.16,2670 Q?.3@16582.48,2645 R?.1@16220,2700.47
+3.3: C19.1 C20.1 D5.2 D6.2
BAT_CURRENT: U?.7@11117.52,10355
BUCK_FB: R?.1@16390,2700.47 R?.2@16220,2759.53 U?.5@25292.52,10255
CTS: U5.11
DRAIN: U?.10@15705.63,10408.66
EN_MOTOR_CURRENT: C?.1@8065,2702.44 U?.8@11117.52,10405
EN_VBACKUP_5V5: Q?.2@19277.6,2725 R?.2@17555,2759.53
EN_VBAT_5V5: Q?.5@16962.4,2725 R?.2@16050,2759.53
FB: C?.1@12165,2702.44 R?.1@12845,2700.47 R?.2@11825,2759.53 U?.3@15745,10241.34
FDTI_RX: U5.5
FDTI_TX: U5.1
G_BAT: D?.1@11300,2735 D?.2@11093.35,2765 Q?.1@9114.84,2412.52 R?.2@10760,2759.53
GATE: Q?.4@14060,2698.23 U?.7@15764.68,10408.66
GDNSIG: B?.1 C?.1@7075,1087.44 C?.1@7075,1357.44 C?.1@7245,1357.44 C?.1@7415,1357.44 C?.1@7585,1357.44 C?.2@7075,5157.56 C?.2@7245,5157.56 C?.2@7415,5157.56 C?.2@7585,5157.56 C?.2@7755,5157.56 C?.2@7925,5157.56 C?.2@8095,5157.56 C?.2@8265,5157.56 C?.2@8435,5157.56 C?.2@8605,5157.56 C?.2@8775,5157.56 C?.2@8945,5157.56 C?.2@9115,5157.56 C?.2@9285,5157.56 C?.2@9455,5157.56 C?.2@10550,5157.56 C?.2@10720,5157.56 C?.2@13215,2757.56 C?.2@13555,2757.56 IC?.EXP R?.2@13250,5159.53 U3.9 U3.20 U3.25 U3.41 U?.2@11231.77,10370 U?.2@17305.51,10355 U?.3@17305.51,10305 U?.6@17494.49,10305 U?.7@17494.49,10355 U?.8@18541.61,10407.68
GND: C18.1 C19.2 C20.2 J6.4 J6.5 J6.6 J6.7 R11.2 U5.7 U5.18 U5.21 U5.25 U5.26
GNDPWR: B?.2 C?.2@8065,2757.56 C?.2@8780,2758.15 C?.2@10585,2757.56 C?.2@12165,2757.56 C?.2@12335,2757.56 C?.2@13725,2757.56 C?.2@14295,2758.15 C?.2@14465,2758.15 C?.2@17405,2758.15 C?.2@18360,2757.56 C?.2@18530,2757.56 C?.2@20560,2757.56 C?.2@20730,2757.56 C?.2@20900,2757.56 C?.2@21070,2757.56 C?.2@21503.9,2630 C?.2@21928.9,2630 D?.1@18730.91,2660 Q?.1@14060,2775 Q?.2@14060,2749.41 Q?.3@14060,2723.82 R?.1@10930,2700.47 R?.1@11655,2700.47 R?.1@11825,2700.47 R?.1@12505,2700.47 R?.1@13390,2700.47 R?.1@16050,2700.47 R?.1@18195,2700.47 R?.1@19100,2700.47 R?.2@15680,2759.53 R?.2@16390,2759.53 U?.1@12962.48,10405 U?.3@17621.77,10332.6 U?.5@11117.52,10255 U?.6@15784.37,10408.66 U?.7@25292.52,10355 Z?.2
INTVCC: C?.1@12335,2702.44 R?.1@11485,2700.47 R?.2@12675,2759.53 U?.8@15745,10408.66
ITH: U?.2@15725.31,10241.34
KILLSWITCH_NFAULT: R?.2@9585,2759.53
KILLSWITCH_UC: R?.2@13390,2759.53 U?.2@17621.77,10370
KILLSWITCH_WATCHDOG: R?.1@15680,2700.47 U?.1@17621.77,10407.4 U?.5@18618.39,10407.68
LANYARD_LOOP_IN: R?.2@13900,2759.53
LANYARD_LOOP_OUT: R?.2@11655,2759.53 U?.4@12962.48,10255
MCLR_KS: U?.4@18618.39,10242.32
MOTOR_CURRENT_FLT: R?.1@7891.3,2770 U?.6@11117.52,10305
NetC18_2: C18.2 U5.17
NetC?_1: C?.1@8780,2651.85 U?.2@12962.48,10355
NetC?_2: C?.2@22905,2757.56 U?.1@25107.48,10405
NetD5_1: D5.1 R13.2
NetD6_1: D6.1 R14.2
NetD?_1: D?.1@11136.65,2765 R?.1@10095,2700.47 U?.5@13147.52,10255
NetIC?_50: IC?.50 R?.1@13250,5100.47
NetJ6_3: J6.3 R12.1
NetQ?_2: Q?.2@22112.48,2695 Q?.4@19917.48,2595 Q?.6@19352.4,2750.59 R?.1@22735,2700.47
NetQ?_6: Q?.6@16767.52,2645 Q?.8@17267.52,2745
NetR11_1: R11.1 R12.2 U5.19
NetR13_1: R13.1 U5.23
NetR14_1: R14.1 U5.22
NetR?_1: R?.1@9585,2700.47 U?.3@12962.48,10305
NetR?_2: R?.2@12505,2759.53 U?.4@15764.68,10241.34
PGEC_KS: U?.6@18592.8,10407.68
PGED_KS: U?.7@18567.2,10407.68
RF_CE: U?.3@10175,10395
RF_CSN: U?.4@10175,10295
RF_GND: C?.2@7725,2757.56 U?.1@10275,10395
RF_IRQ: U?.8@9975,10295
RF_MISO: U?.7@9975,10395
RF_MOSI: U?.6@10075,10295
RF_SCK: U?.5@10075,10395
RTS: U5.3
RXN: IC?.53
RXP: IC?.52
SCL: U?.4@11328.23,10332.6
SDA: U?.5@11328.23,10407.4
SENSE: D?.1@9796.65,2765 Q?.2@9205,2654.65 R?.1@9415,2700.47 R?.2@9940,2764.13 R?.4@9940,2735
SWITCH_MOSFET: Q?.1@19277.6,2750.59 Q?.4@16962.4,2699.41
SWITCH_ON: R?.1@17555,2700.47 U?.1@15705.63,10241.34
TXN: IC?.56
TXP: IC?.55
UC_KS_1: U?.3@18592.8,10242.32
UC_KS_2: U?.2@18567.2,10242.32
USB_D_N: J6.2 U5.16
USB_D_P: J6.1 U5.15
USB_DN: IC?.58
USB_DP: IC?.59
VBACKUP: C?.1@14465,2651.85 L?.1@15400,2655 U?.9@15725.31,10408.66
VBAT: C?.2@8915,2757.56 F?.2 R?.1@9940,2655.87 R?.3@9940,2685 U?.2@25107.48,10355 U?.8@13147.52,10405 Z?.1
VBAT_5V5_EN: R?.2@19100,2759.53 U?.3@25107.48,10305
VBAT_IN: F?.1
VBAT_SW: C?.1@22905,2702.44 D?.2@18969.09,2660 L?.1@19644.84,2670 U?.8@25292.52,10405
VBAT_SWITCHED: D?.2@11392.56,2735 Q?.3@9295.16,2412.52 U?.1@10932.48,10405 U?.2@10932.48,10355
VMOTOR: U?.3@10932.48,10305 U?.4@10932.48,10255
XI: C?.1@10720,5102.44 IC?.61 R?.2@12620,5159.53 X?.3
XO: C?.1@10550,5102.44 IC?.60 R?.1@12620,5100.47 X?.1
pads on no net: C?.1@8915,2702.44 C?.1@10585,2702.44 C?.1@18360,2702.44 C?.1@18530,2702.44 D?.1@15168.78,2523.9 D?.2@9753.35,2765 D?.3 IC?.1 IC?.2 IC?.3 IC?.4 IC?.6 IC?.7 IC?.8 IC?.9 IC?.11 IC?.12 IC?.13 IC?.14 IC?.16 IC?.17 IC?.18 IC?.20 IC?.21 IC?.22 IC?.23 IC?.24 IC?.25 IC?.26 IC?.28 IC?.29 IC?.30 IC?.31 IC?.32 IC?.34 IC?.35 IC?.36 IC?.37 IC?.40 IC?.41 IC?.42 IC?.43 IC?.44 IC?.45 IC?.47 IC?.48 IC?.62 IC?.63 J?.0 J?.1 J?.2 J?.3 J?.4 J?.5 J?.6 J?.7 J?.8 J?.9 J?.10 J?.11 J?.12 L?.2@15559,2655 Q?.1@16582.48,2745 Q?.1@16887.6,2750.59 Q?.1@19917.48,2745 Q?.2@16582.48,2695 Q?.2@16887.6,2725 Q?.2@17082.48,2695 Q?.2@19917.48,2695 Q?.3@16887.6,2699.41 Q?.3@17082.48,2645 Q?.3@19277.6,2699.41 Q?.3@22112.48,2645 Q?.4@16582.48,2595 Q?.4@17082.48,2595 Q?.4@19352.4,2699.41 Q?.4@22112.48,2595 Q?.5@14128.9,2736.61 Q?.5@14173.19,2698.23 Q?.5@14173.19,2723.82 Q?.5@14173.19,2749.41 Q?.5@14173.19,2775 Q?.5@16767.52,2595 Q?.5@17267.52,2595 Q?.5@19352.4,2725 Q?.5@20102.52,2595 Q?.5@22297.52,2595 Q?.6@16962.4,2750.59 Q?.6@17267.52,2645 Q?.6@20102.52,2645 Q?.6@22297.52,2645 Q?.7 Q?.8@16767.52,2745 Q?.8@20102.52,2745 Q?.8@22297.52,2745 R?.1@10760,2700.47 R?.1@12675,2700.47 R?.1@13900,2700.47 R?.1@18025,2700.47 R?.1@20390,2700.47 R?.2@9415,2759.53 R?.2@10095,2759.53 R?.2@10930,2759.53 R?.2@11485,2759.53 R?.2@18195,2759.53 R?.2@20390,2759.53 U3.1 U3.2 U3.3 U3.4 U3.5 U3.6 U3.7 U3.8 U3.11 U3.12 U3.13 U3.14 U3.15 U3.16 U3.17 U3.18 U3.21 U3.22 U3.23 U3.24 U3.27 U3.28 U3.29 U3.30 U3.31 U3.32 U3.33 U3.34 U3.35 U3.36 U3.37 U3.39 U3.40 U3.42 U3.43 U3.44 U3.45 U3.46 U3.47 U3.48 U3.49 U3.50 U3.51 U3.52 U3.53 U3.54 U3.55 U3.56 U3.58 U3.59 U3.60 U3.61 U3.62 U3.63 U3.64 U5.2 U5.6 U5.8 U5.9 U5.10 U5.12 U5.13 U5.14 U5.24 U5.27 U5.28 U?.1@9790,10810 U?.1@10601.03,11939.53 U?.1@10638.43,11262.76 U?.1@11231.77,10407.4 U?.2@10534.49,11262.76 U?.3@10638.43,11278.5 U?.4@10534.49,11278.5 U?.4@17718.23,10332.6 U?.4@25107.48,10255 U?.5@10638.43,11294.25 U?.5@15784.37,10241.34 U?.5@17494.49,10255 U?.6@10534.49,11294.25 U?.6@13147.52,10305 U?.6@25292.52,10305 U?.7@10638.43,11310 U?.7@13147.52,10355 U?.8@10534.49,11310 U?.9@10638.43,11325.75 U?.9@25200,10330 U?.10@10534.49,11325.75 U?.11 U?.13 U?.14 U?.15 U?.16 U?.17 U?.18 U?.19 U?.20 U?.21 U?.22 U?.23 U?.24 U?.25 U?.26 U?.27 U?.28 U?.29 U?.30 U?.31 U?.32 U?.33 U?.34 U?.35 U?.36 U?.37 U?.38 U?.39 U?.40 U?.41 U?.42 U?.43 U?.44 U?.45 U?.46 U?.47 U?.48 U?.49 U?.50 U?.51 U?.52 U?.53 U?.54 U?.55 U?.56 U?.57 U?.58 U?.59 U?.60 U?.61 U?.62 U?.63 U?.64 U?.65 U?.66 U?.67 U?.68 U?.69 U?.70 X?.2 X?.4

## Text inside footprints (layer, text, board x,y; h text height)
C?: Mechanical 19 "+" at 14520,2763 h40 r90; Mechanical 19 "-" at 14519,2641 h40 r90
C?: Mechanical 19 "+" at 14350,2763 h40 r90; Mechanical 19 "-" at 14349,2641 h40 r90
C?: Top Overlay "+" at 21650.35,2600.98 h59.06
C?: Top Overlay "+" at 21225.35,2600.98 h59.06
IC?: Top Overlay "*" at 12765,5135 h77.5
U?: Top Overlay "Antenna" at 9975,9345 h40 r90